# Altium PCB agm_evb.PcbDoc
Units mm, origin at the board's own origin, x right, y up, seen from the top; angles counter-clockwise.
Board outline 29 x 45.6 mm, 2 copper layers (Top Layer, Bottom Layer); 59 components, 56 nets, 240 pads, 237 vias.
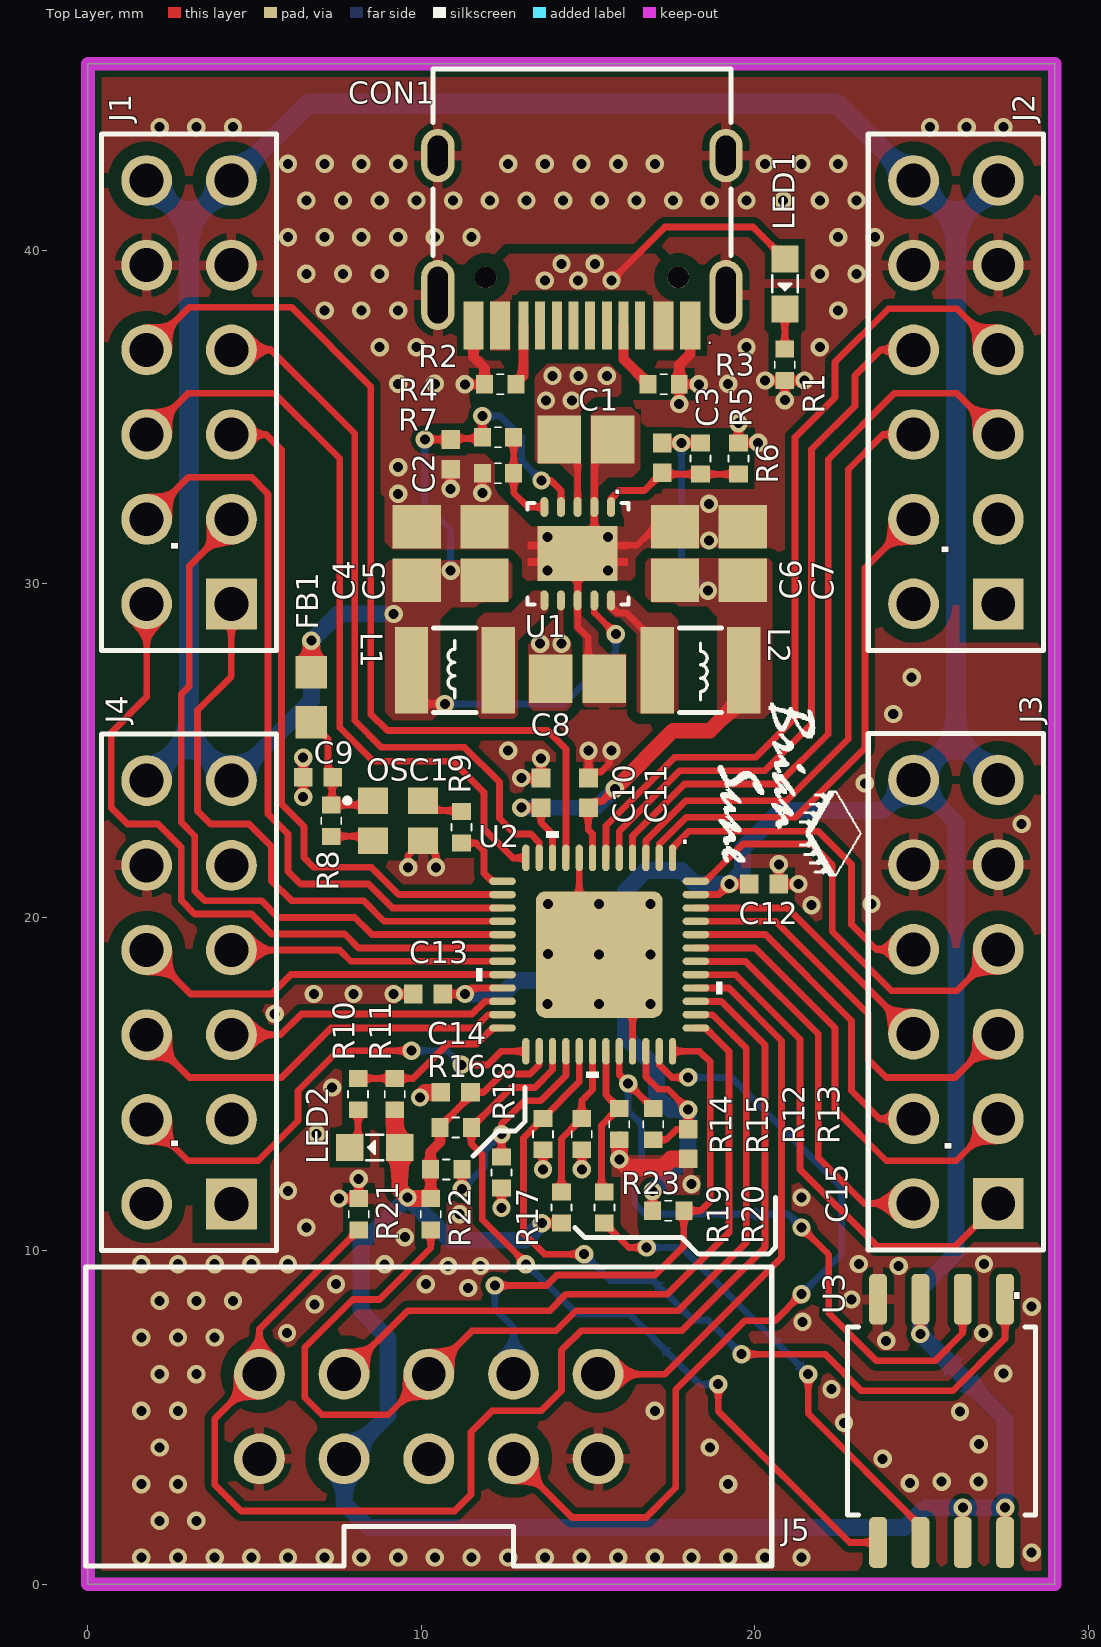
[diagram p0: Top Layer view]
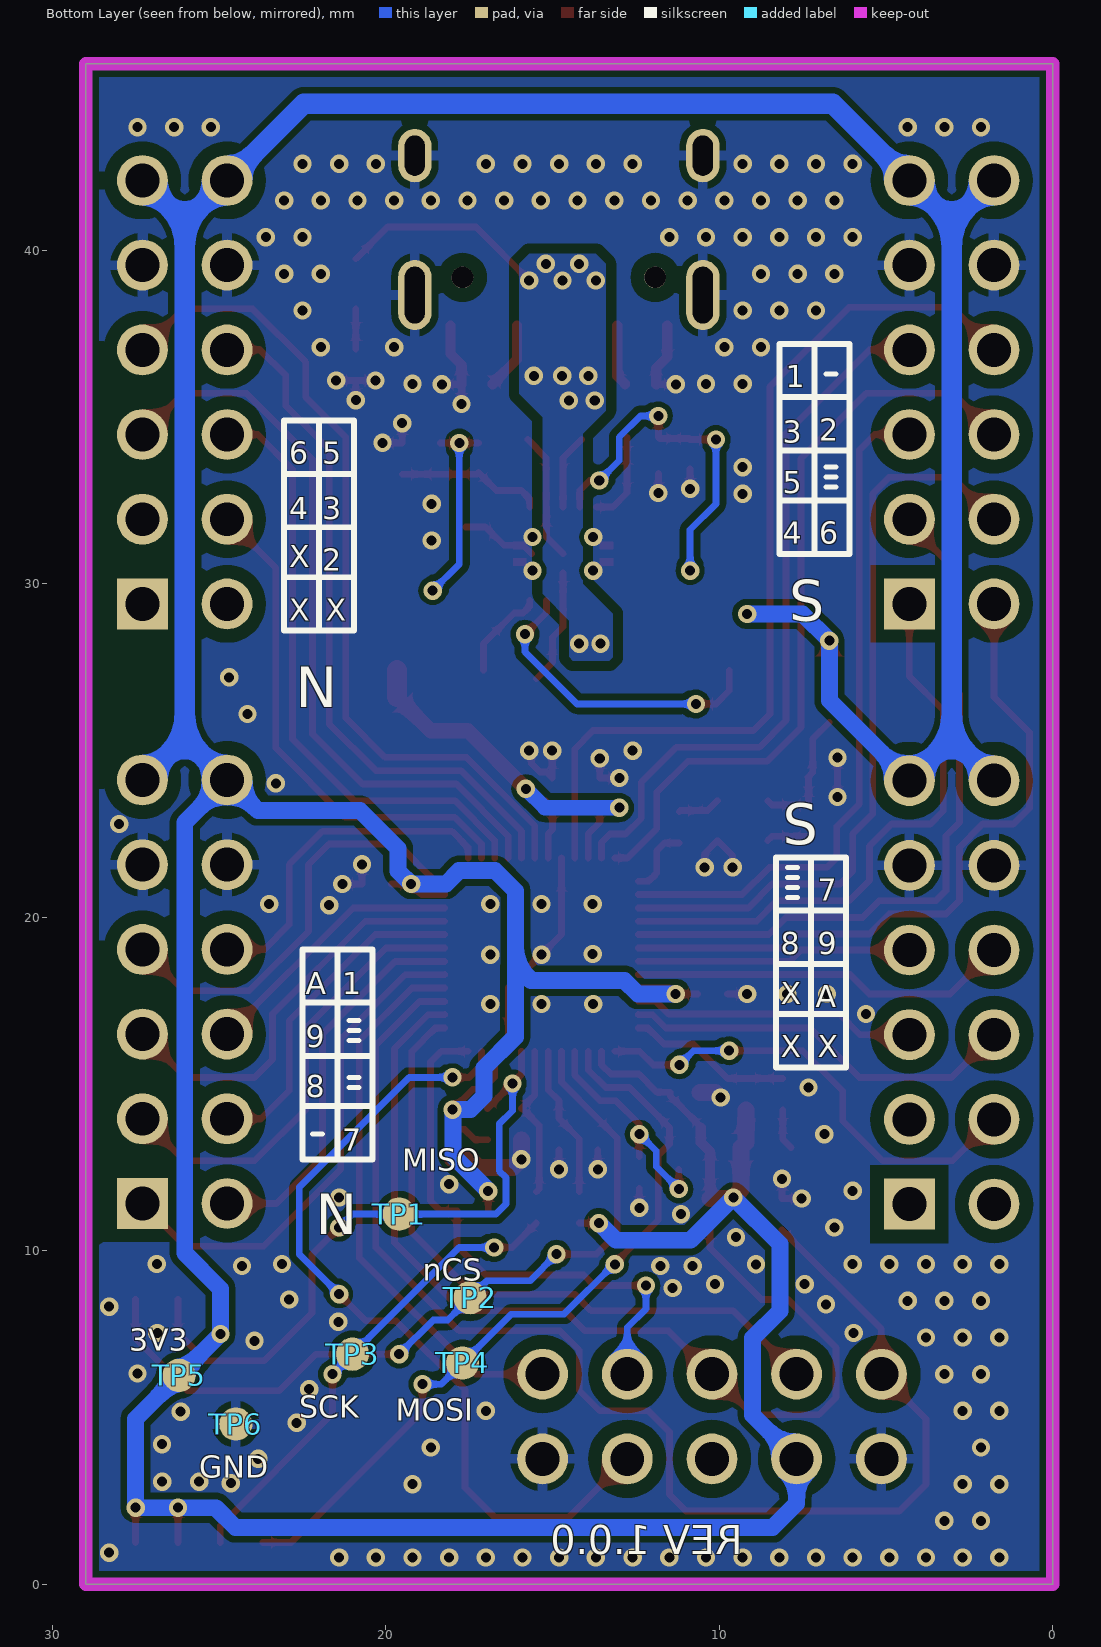
[diagram p1: Bottom Layer view, seen from below]
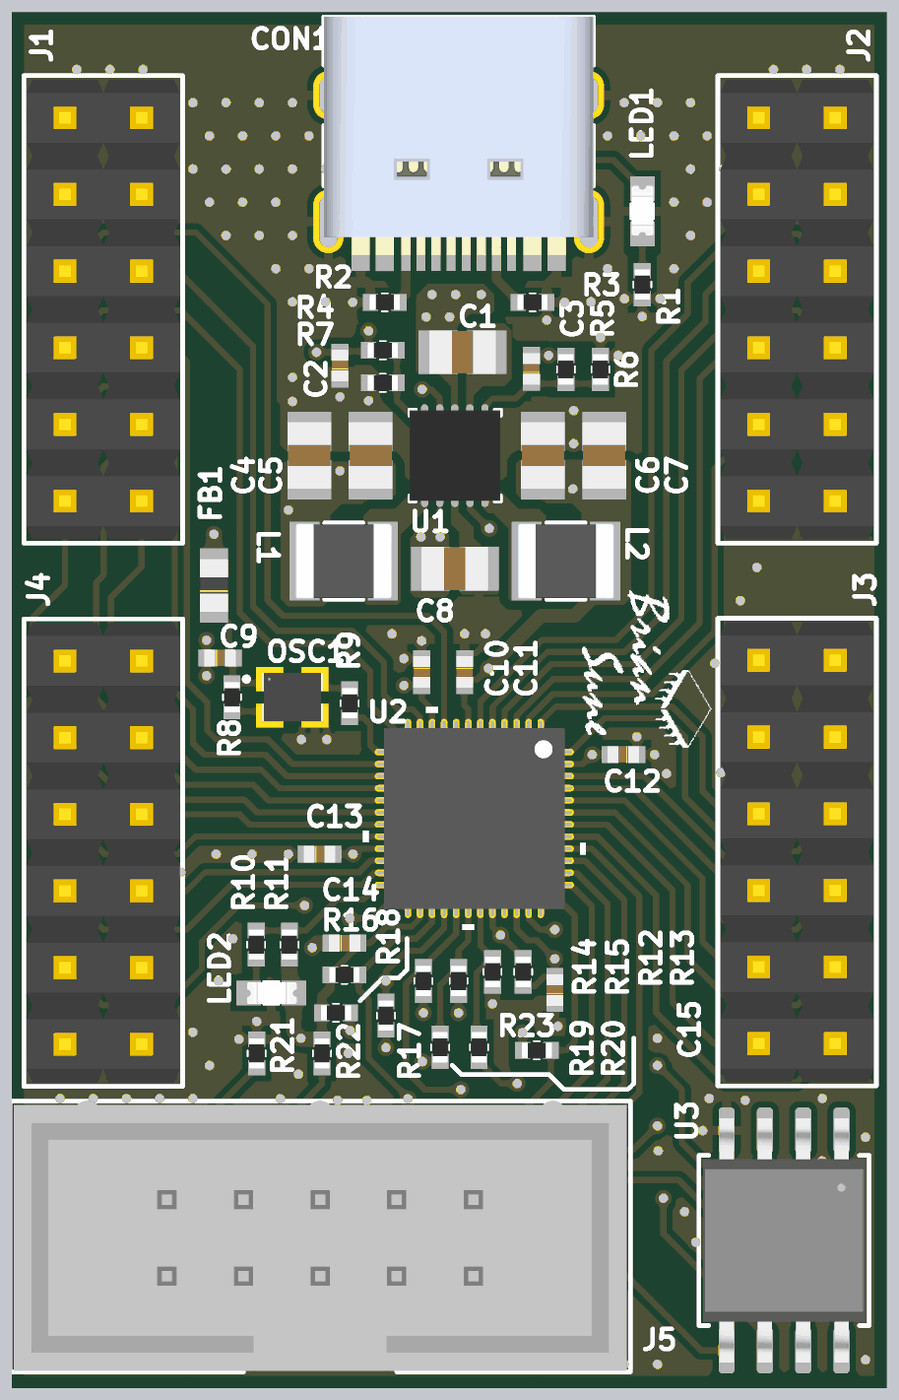
[diagram p2: 3D render of the assembled board from above, using the file's embedded part models]

## Layer stack, top to bottom
Top Solder: solder mask 0.0102, Solder Resist, Dk 3.5
Top Layer: signal copper 0.0356
Dielectric 1: dielectric 0.32, FR-4, Dk 4.8
Bottom Layer: signal copper 0.0356
Bottom Solder: solder mask 0.0102, Solder Resist, Dk 3.5

## Board outline
0,0 29,0 29,45.6 0,45.6

## Design rules (kind name [scope] priority, off if disabled: settings)
Clearance [All] p1: gap=0.152 ignorepadtopadclearanceinfootprint=FALSE except(0: Arc-Hole Track-Hole SMDPad-Hole THPad-Hole Via-Hole Fill-Hole Poly-Hole Region-Hole Text-Hole; 0.203: Arc-Poly Track-Poly SMDPad-Poly SMDPad-Region THPad-Region Fill-Poly Poly-Region; 0.305: Poly-Poly; 0.406: THPad-Poly)
ComponentClearance [All] p1: gap=0.508 collisioncheckmode=3 verticalgap=0.254 showdistances=FALSE
DiffPairsRouting [All] p1: maxlimit=0.254 minlimit=0.152 mostfreqgap=0.203 toplayer_minwidth=0.152 toplayer_maxwidth=0.381 toplayer_prefwidth=0.203 bottomlayer_minwidth=0.152 bottomlayer_maxwidth=0.381 bottomlayer_prefwidth=0.203 maxuncoupledlength=12.7
Height [All] p1: minheight=0 maxheight=40 prefheight=12.7
HoleSize [All] p1: absolutevalues=TRUE maxlimit=6 minlimit=0.025 maxpercent=80.000 minpercent=20.000
HoleToHoleClearance [All] p1: gap=0.076 allowstackedmicrovias=TRUE
MinimumSolderMaskSliver [All] p1: minsoldermaskwidth=0.025
PolygonConnect Pour_Fill [All vs IsNamedPolygon('SW1V2L_L1', 'SW3V3L_L1', '+1V2_PO_L1', '+3V3_PO_L1', 'GND_DCDC_L1', '+5V_L1', '+5V_L1_A', '+5V_L1_B')] p1: connectstyle=Direct reliefconductorwidth=0.254 reliefentries=4 polygonreliefangle="90 Angle" airgapwidth=0.254
PolygonConnect [All] p2: thpad.connectstyle=Relief thpad.reliefconductorwidth=0.305 thpad.reliefentries=4 thpad.polygonreliefangle="90 Angle" thpad.airgapwidth=0.203 smdpad.connectstyle=Relief smdpad.reliefconductorwidth=0.305 smdpad.reliefentries=4 smdpad.polygonreliefangle="90 Angle" smdpad.airgapwidth=0.203 via.connectstyle=Direct via.reliefconductorwidth=0.305 via.reliefentries=4 via.polygonreliefangle="45 Angle" via.airgapwidth=0.203
RoutingVias [All] p1: holewidth=0.4 width=0.6 viastyle="Through Hole" minholewidth=0.3 minwidth=0.5 maxholewidth=2.8 maxwidth=3
SilkToSilkClearance [All] p1: silktosilkclearance=0.076
SilkToSolderMaskClearance [IsPad] p1: minsilkscreentomaskgap=0.025 clearancetoexposedcopper=TRUE
SolderMaskExpansion [All] p1: expansion=0.003
Width [All] p1: maxlimit=1.016 minlimit=0.152 preferedwidth=0.254
22 further rules are at their usual default settings.

## Components (designator, comment, footprint, x,y, rotation, side; value= is the part's Value field where it differs from the comment)
C1 "22uF" CAPC220145_145N_KEM 14.939,34.332 r180 top (schematic designator C13)
C2 "100nF" CAP_CC0402_YAG 10.875,33.887 r90 top (schematic designator C8)
C3 "33pF" CAP_CC0402_YAG 17.225,33.782 r90 top (schematic designator C1)
C4 "22uF" CAPC220145_145N_KEM 9.859,30.906 r270 top (schematic designator C3)
C5 "22uF" CAPC220145_145N_KEM 11.891,30.906 r270 top (schematic designator C2)
C6 "22uF" CAPC220145_145N_KEM 17.606,30.906 r270 top (schematic designator C5)
C7 "22uF" CAPC220145_145N_KEM 19.638,30.906 r270 top (schematic designator C6)
C8 "22uF" CAPC220145_145N_KEM 14.685,27.156 r180 top (schematic designator C12)
C9 "100nF" CAP_CC0402_YAG 6.9,24.2 r0 top (schematic designator C7)
C10 "470nF" CAP_CC0402_YAG 13.585,23.734 r270 top
C11 "470nF" CAP_CC0402_YAG 15.01,23.734 r270 top
C12 "2.2uF" CAP_CC0402_YAG 20.273,21 r180 top (schematic designator C14)
C13 "470nF" CAP_CC0402_YAG 10.2,17.7 r0 top (schematic designator C4)
C14 "470nF" CAP_CC0402_YAG 11.027,14.752 r0 top (schematic designator C9)
C15 "470nF" CAP_CC0402_YAG 18,13.2 r90 top
CON1 "DX07S016JA1R1500" CONN12_016JA1R1500_JAE 14.812,42.844 r180 top
FB1 "BLM18AG121SN1D" IND_BLM18_0603_MUR 6.7,26.6 r90 top
J1 "PMOD_S1" CON12_2X6_P100UM_HDR_TYC 4.3,29.4 r90 top locked (schematic designator J2)
J2 "PMOD_N2" CON12_2X6_P100UM_HDR_TYC 27.3,29.4 r90 top (schematic designator J5)
J3 "PMOD_N1" CON12_2X6_P100UM_HDR_TYC 27.3,11.42 r90 top (schematic designator J4)
J4 "PMOD_S2" CON12_2X6_P100UM_HDR_TYC 4.3,11.4 r90 top locked (schematic designator J3)
J5 "JTAG" CONN10_G821_20P32X8P7_AMP 15.3,3.76 r180 top (schematic designator J1)
L1 "2.2uH" 1277AS-H-1R0M=P2 11.002,27.41 r0 top
L2 "2.2uH" 1277AS-H-1R0M=P2 18.368,27.41 r180 top
LED1 "SML-LX0603GW-TR" LED_SML-LX0603GW-TR_LUM 20.9,39 r90 top (schematic designator LED2)
LED2 "SML-LX0603GW-TR" LED_SML-LX0603GW-TR_LUM 8.6,13.1 r0 top (schematic designator LED1)
OSC1 "SIT1602AI-73-33S-30.000000G" SON4_SIT1602-7_SIT 9.3,22.9 r0 top
R1 "10k" 0402_PAN 20.9,36.57 r90 top (schematic designator R13)
R2 "5k1" 0402_PAN 12.362,35.986 r0 top (schematic designator R7)
R3 "5k1" 0402_PAN 17.262,35.986 r180 top (schematic designator R8)
R4 "100k" 0402_PAN 12.296,34.395 r180 top (schematic designator R1)
R5 "100k" 0402_PAN 18.368,33.76 r90 top (schematic designator R3)
R6 "100k" 0402_PAN 19.511,33.76 r270 top (schematic designator R4)
R7 "22k1" 0402_PAN 12.296,33.316 r0 top (schematic designator R2)
R8 "10k" 0402_PAN 7.3,22.9 r270 top (schematic designator R9)
R9 "22R" 0402_PAN 11.2,22.7 r90 top (schematic designator R14)
R10 "10k" 0402_PAN 8.1,14.7 r270 top (schematic designator R5)
R11 "10k" 0402_PAN 9.2,14.7 r270 top (schematic designator R6)
R12 "0R" 0402_PAN 15.935,13.8 r90 top (schematic designator R19)
R13 "0R" 0402_PAN 16.95,13.8 r90 top (schematic designator R16)
R14 "0R" 0402_PAN 13.645,13.5 r90 top (schematic designator R15)
R15 "0R" 0402_PAN 14.809,13.5 r90 top (schematic designator R18)
R16 "0R" 0402_PAN 11.027,13.7 r0 top (schematic designator R17)
R17 "0R" 0402_PAN 12.4,12.349 r90 top (schematic designator R23)
R18 "0R" 0402_PAN 10.744,12.441 r180 top (schematic designator R22)
R19 "10k" 0402_PAN 14.2,11.3 r270 top (schematic designator R20)
R20 "22R" 0402_PAN 15.488,11.3 r270 top (schematic designator R21)
R21 "5k1" 0402_PAN 8.117,11.1 r270 top (schematic designator R12)
R22 "10k" 0402_PAN 10.279,11.1 r90 top (schematic designator R10)
R23 "10k" 0402_PAN 17.4,11.2 r180 top (schematic designator R11)
TP1 "TP" 2mm_tp 19.6,11.1 r0 bottom (schematic designator TP2)
TP2 "TP" 2mm_tp 17.473,8.594 r90 bottom (schematic designator TP1)
TP3 "TP" 2mm_tp 21,6.9 r0 bottom
TP4 "TP" 2mm_tp 17.7,6.636 r0 bottom
TP5 "TP" 2mm_tp 26.2,6.265 r90 bottom
TP6 "TP" 2mm_tp 24.5,4.804 r90 bottom
U1 "TPS62410DRCT" DRC0010J 14.685,30.906 r270 top
U2 "AG1280Q48" QFN48_EP 15.332,18.883 r270 top
U3 "16Mbit" SOIC_16JLSSIG_WIN 25.6,4.9 r270 top

## Footprints (in the part's own frame and the unit in brackets; to place one, negate y for a bottom-side part, rotate by r counter-clockwise, add the part's x,y. Pads: shape width x height; smd on the part's side, far side on the other; paste and mask are expansions set on the pad)
2mm_tp [mm]
  round 1 smd: 1(0,0)
0402_PAN [mil]
  rect 20x22 smd paste+0 mask+0: 1(-18.5,0) 2(18.5,0)
  silkscreen extent -4,-12 4,12, body extent -20,-10 20,10, height 14
1277AS-H-1R0M=P2 [mm]
  rect 1x2.6 smd paste+0 mask+0: 1(-1.3,0) 2(1.3,0)
  silkscreen extent -0.64,-1.27 0.64,1.27, body extent -1.6,-1.25 1.6,1.25, height 1.2
CAP_CC0402_YAG [mil]
  rect 22x22 smd: 1(-17.5,0) 2(17.5,0)
  body extent -21,-11 21,11, height 22
CAPC220145_145N_KEM [mm]
  rect 1.306x1.45 smd paste+0 mask+0: 1(-0.803,0) 2(0.803,0)
  body extent -1.1,-0.72 1.1,0.72, height 1.45
CON12_2X6_P100UM_HDR_TYC [mil]
  rect 60x60 hole 40 mask+0: 1(0,0)
  round 60 hole 40 mask+0: 2(0,100) 3(100,0) 4(100,100) 5(200,0) 6(200,100) 7(300,0) 8(300,100) 9(400,0) 10(400,100) 11(500,0) 12(500,100)
  silkscreen extent -55,-54 555,154, body extent -50,-50 550,150, height 374
CONN10_G821_20P32X8P7_AMP [mil]
  round 60 hole 40 mask+0: 1(400,0) 2(400,-100) 3(300,0) 4(300,-100) 5(200,0) 6(200,-100) 7(100,0) 8(100,-100) 9(0,0) 10(0,-100)
  silkscreen extent -205,-227 605,127, body extent -200,-227 600,125, height 357
CONN12_016JA1R1500_JAE [mm]
  rect 0.3x1.45 smd: CC1(-1.25,5.095) CC2(1.75,5.095) D+(-0.25,5.095) D+(0.75,5.095) D-(-0.75,5.095) D-(0.25,5.095) SBUS1(1.25,5.095) SBUS2(-1.75,5.095)
  rect 0.6x1.45 smd: GND(-3.25,5.095) GND(3.25,5.095) VBUS(-2.45,5.095) VBUS(2.45,5.095)
  round 0.65 hole 0.65 unplated: M1(2.89,3.65) M2(-2.89,3.65)
  oval 1x2.1 hole 0.6 slot 1.7 at 90 deg mask+0: S(-4.32,4.18) S(4.32,4.18)
  oval 1x1.6 hole 0.6 slot 1.2 at 90 deg mask+0: S(-4.32,0) S(4.32,0)
  silkscreen extent -4.47,-2.6 4.47,3, body extent -4.47,-2.6 4.47,5.3, height 3.2
DRC0010J [mm]
  oval 0.6x0.24 smd: 1(-1.4,1) 2(-1.4,0.5) 3(-1.4,0) 4(-1.4,-0.5) 5(-1.4,-1) 6(1.4,-1) 7(1.4,-0.5) 8(1.4,0) 9(1.4,0.5) 10(1.4,1)
  rect 1.65x2.4 smd: 11(0,0)
  Top Layer region: 0.135,1.5 0.135,1.1 0.365,1.1 0.365,1.5
  Top Layer region: -0.135,1.1 -0.135,1.5 -0.365,1.5 -0.365,1.1
  Top Layer region: -0.135,-1.5 -0.135,-1.1 -0.365,-1.1 -0.365,-1.5
  Top Layer region: 0.135,-1.1 0.135,-1.5 0.365,-1.5 0.365,-1.1
  silkscreen extent -1.52,-1.5 1.52,1.52, body extent -1.5,-1.5 1.5,1.5, height 1
IND_BLM18_0603_MUR [mil]
  rect 38x37 smd paste+0 mask+0: 1(-29.5,0) 2(29.5,0)
  body extent -34,-19 34,19, height 37
LED_SML-LX0603GW-TR_LUM [mil]
  rect 32x32 smd paste+0 mask+0: 1(-29.5,0) 2(29.5,0)
  silkscreen extent -10,-15 10,15, body extent -32,-14 33,14, height 27
QFN48_EP [mm]
  rrect100% 0.8x0.22 smd paste-0.051 mask+0.001: 1(-2.9,2.2) 2(-2.9,1.8) 3(-2.9,1.4) 4(-2.9,1) 5(-2.9,0.6) 6(-2.9,0.2) 7(-2.9,-0.2) 8(-2.9,-0.6) 9(-2.9,-1) 10(-2.9,-1.4) 11(-2.9,-1.8) 12(-2.9,-2.2) 25(2.9,-2.2) 26(2.9,-1.8) 27(2.9,-1.4) 28(2.9,-1) 29(2.9,-0.6) 30(2.9,-0.2) 31(2.9,0.2) 32(2.9,0.6) 33(2.9,1) 34(2.9,1.4) 35(2.9,1.8) 36(2.9,2.2)
  rrect100% 0.22x0.8 smd paste-0.051 mask+0.001: 13(-2.2,-2.9) 14(-1.8,-2.9) 15(-1.4,-2.9) 16(-1,-2.9) 17(-0.6,-2.9) 18(-0.2,-2.9) 19(0.2,-2.9) 20(0.6,-2.9) 21(1,-2.9) 22(1.4,-2.9) 23(1.8,-2.9) 24(2.2,-2.9) 37(2.2,2.9) 38(1.8,2.9) 39(1.4,2.9) 40(1,2.9) 41(0.6,2.9) 42(0.2,2.9) 43(-0.2,2.9) 44(-0.6,2.9) 45(-1,2.9) 46(-1.4,2.9) 47(-1.8,2.9) 48(-2.2,2.9)
  rrect15% 3.8x3.8 smd paste-6 mask+0.025: 49(0,0)
  silkscreen extent -3.7,-3.7 3.7,3.7, body extent -3,-3 3,3, height 0.9
SOIC_16JLSSIG_WIN [mil]
  rrect50% 60x21 smd: 1(-143.5,75) 2(-143.5,25) 3(-143.5,-25) 4(-143.5,-75) 5(143.5,-75) 6(143.5,-25) 7(143.5,25) 8(143.5,75)
  silkscreen extent -111,-111 111,111, body extent -159,-106 159,106, height 85
SON4_SIT1602-7_SIT [mm]
  rect 0.9x0.8 smd paste-0.4 mask+0: 1(-0.75,-0.6) 2(0.75,-0.6) 3(0.75,0.6) 4(-0.75,0.6)
  silkscreen extent -1.6,0.52 -1.45,0.68, body extent -1,-0.8 1,0.8, height 0.8

## Part data
C1 C4 C5 C6 C7 C8: library part C0805C106M9RACTU, "No Description Available", Mfr_Name=Kemet, Copyright="Copyright (C) 2022 Ultra Librarian. All rights reserved.", Manufacturer_Part_Number=C0805C106M9RACTU, RefDes=RefDes, Type=DEV
C2 C9: library part GCM155R71H104ME02J, "GCM155R71H104ME02J / Multilayer Ceramic Capacitors MLCC - SMD/SMT", Mfr.="Murata Electronics", ComponentLink1Description=mouser, ComponentLink1URL=https://www.mouser.hk/ProductDetail/Murata-Electronics/GCM155R71H104ME02J?qs=QzBtWTOodeX25ZLBhHkqFQ%3D%3D, Mfr. No=GCM155R71H104ME02J
C3: library part GCM1555C1H330JA16J, "GCM1555C1H330JA16J", Mfr.="Murata Electronics", ComponentLink1Description=mouser, ComponentLink1URL=https://www.mouser.hk/ProductDetail/Murata-Electronics/GCM1555C1H330JA16J?qs=hNud%2FORuBR35r9xfgxU5AA%3D%3D, Mfr. No=GCM1555C1H330JA16J
C10 C11 C13 C14 C15: library part GRM155R71A474KE01D, "GRM155R71A474KE01D / Multilayer Ceramic Capacitors MLCC - SMD/SMT PLEASE SEE MURATA'S SUGGESTED ALTERNATE GRM155R61H474ME11D", Mfr.="Murata Electronics", Mfr. No=GRM155R6YA474ME01D, ComponentLink1Description=mouser, ComponentLink1URL=https://www.mouser.hk/ProductDetail/Murata-Electronics/GRM155R6YA474ME01D?qs=sGAEpiMZZMsh%252B1woXyUXj0ipSi1CtQgVFCJAGxNeTMI%3D
C12: library part GRM155R6YA225ME11D, "GRM155R6YA225ME11D / Multilayer Ceramic Capacitors MLCC - SMD/SMT 2.2UF 35V 20% 0402", Mfr.="Murata Electronics", ComponentLink1Description=mouser, ComponentLink1URL=https://www.mouser.hk/ProductDetail/Murata-Electronics/GRM155R6YA225ME11D?qs=84nSAGdh8NX%252BZ1uZ5doDKg%3D%3D, Mfr. No=GRM155R6YA225ME11D
CON1 LED1 LED2 OSC1: "No Description Available", Copyright="Copyright (C) 2018 Accelerated Designs. All rights reserved", RefDes=RefDes, Type=DEV
  CON1: Built_By=EMA_Matt, Datasheet=https://www.digikey.com/product-detail/en/DX07S016JA1R1500/670-DX07S016JA1R1500CT-ND/11586676?utm_campaign=buynow&WT.z_cid=ref_octopart_dkc_buynow&utm_medium=aggregator&curr=usd&site=us&utm_source=octopart, Manufacturer_Part_Number=DX07S016JA1R1500, SourceLibrary=JAE_Electronics_2020-03-30, Vendor="JAE Electronics"
  LED1 LED2: Built_By=EMA_Cory, Datasheet=https://www.lumex.com/spec/SML-LX0603GW-TR.pdf, Manufacturer_Part_Number=SML-LX0603GW-TR, SourceLibrary=Lumex_2020-09-08, Vendor=Lumex
  OSC1: Built_By=EMA_Justin, Manufacturer_Part_Number=SIT1602AI-73-33S-30.000000G, SourceLibrary=SiTime_2019-03-28_19, Vendor=SiTime
FB1: "No Description Available", Mfr_Name=Murata, Copyright="Copyright (C) 2022 Ultra Librarian. All rights reserved.", Manufacturer_Part_Number=BLM18AG121SN1D, RefDes=RefDes, Type=DEV
J1 J2 J3 J4: library part 10129381-912001BLF, "10129381-912001BLF / Headers & Wire Housings ECONOSTIK HEADER DR VT TH 2X6", Mfr. No=826942-6, ComponentLink1Description=mouser, ComponentLink1URL=https://www.mouser.hk/ProductDetail/Amphenol-FCI/10129381-912001BLF?qs=0lQeLiL1qybH5JyuikDxjQ%3D%3D, Mfr.=10129381-912001BLF
J5: library part G821EU210AGM00Y, "G821EU210AGM00Y / Headers & Wire Housings Box Header 2.54mm*2.54mm Pitch STR DIP, 2x5Pin, G/F, NY6T, TAIL=3.0mm, Color-Black, T&R, WO/CAP", Mfr.="Amphenol ICC", ComponentLink1Description=mouser, ComponentLink1URL=https://www.mouser.hk/ProductDetail/Amphenol-Commercial-Products/G821EU210AGL00RS?qs=PzGy0jfpSMsw%252Bc01gC9TMg%3D%3D, Mfr. No=G821EU210AGM00Y
L1 L2: library part 1277AS-H-2R2M=P2, "1277AS-H-2R2M=P2 / SMD 2.2 UH 20%", Manufacturer_Part_Number=1277AS-H-2R2M=P2, Mfr_Name=Murata, ComponentLink1Description=mouser, ComponentLink1URL=https://www.mouser.hk/ProductDetail/Murata-Electronics/1277AS-H-2R2M%3DP2?qs=4tuKoHGzn104DGWhEjLPYA%3D%3D
R1 R8 R10 R11 R19 R22 R23: library part RT0402FRE0710KL, "RT0402FRE0710KL / SMD 1/16W 10K ohm 1% 50ppm", Mfr.=YAGEO, ComponentLink1Description=mouser, ComponentLink1URL=https://www.mouser.hk/ProductDetail/YAGEO/RT0402FRE0710KL?qs=BXCcY9r%252B08Amup7nMFKW1g%3D%3D, Mfr. No=RT0402FRE0710KL
R2 R3 R21: library part RT0402FRE075K1L, "RT0402FRE075K1L / Thin Film Resistors - SMD 5.1K OHM 1% 50PPM 1/16W", Mfr.=YAGEO, ComponentLink1Description=mouser, ComponentLink1URL=https://www.mouser.hk/ProductDetail/YAGEO/RT0402FRE075K1L?qs=gY0y7AQI9SP4FZkrbB0g%252BA%3D%3D, Mfr. No=RT0402FRE075K1L
R4 R5 R6: library part RT0402FRE07100KL, "RT0402FRE07100KL / SMD 1/16W 100K ohm 1% 50ppm", Mfr.=YAGEO, ComponentLink1Description=mouser, ComponentLink1URL=https://www.mouser.hk/ProductDetail/YAGEO/RT0402FRE07100KL?qs=BXCcY9r%252B08CxTvf5JB1kiw%3D%3D, Mfr. No=RT0402FRE07100KL
R7: library part RT0402FRE0722K1L, "RT0402FRE0722K1L / SMD 1/16W 22.1K ohm 1% 50ppm", Mfr.=YAGEO, ComponentLink1Description=mouser, ComponentLink1URL=https://www.mouser.hk/ProductDetail/YAGEO/RT0402FRE0722K1L?qs=gY0y7AQI9SNvNyhDoNY8tg%3D%3D, Mfr. No=RT0402FRE0722K1L
R9 R20: library part RT0402FRE0722RL, "RT0402FRE0722RL / SMD 1/16W 22 ohm 1% 50ppm", Mfr.=YAGEO, ComponentLink1Description=mouser, ComponentLink1URL=https://www.mouser.hk/ProductDetail/YAGEO/RT0402FRE0722RL?qs=BXCcY9r%252B08AR6tDwkCsBaQ%3D%3D, Mfr. No=RT0402FRE0722RL
R12 R13 R14 R15 R16 R17 R18: library part RC0402FR-070RL, "RC0402FR-070RL / Thick Film Resistors - SMD 0 Ohms 62.5mW 0402 1%", Mfr.=YAGEO, ComponentLink1Description=mouser, ComponentLink1URL=https://www.mouser.hk/ProductDetail/YAGEO/RC0402FR-070RL?qs=sxZXDnvRBEhfSy4CZGX2ww%3D%3D, Mfr. No=RC0402FR-070RL
U1: "TPS62410DRCT / 2.25MHZ 2x800mA Dual Step-Down", Mfr_Name="Texas Instruments", ComponentLink1Description=mouser, ComponentLink1URL=https://www.mouser.hk/ProductDetail/Texas-Instruments/TPS62410DRCR?qs=e2UXF4UEWQ0ltUOqd4EYmg%3D%3D, Manufacturer_Part_Number=TPS62410DRCT
U2: "AG1280Q48 / Replacement EPM1270", Mfr.=AGM, ComponentLink1Description=taobao, ComponentLink1URL=https://item.taobao.com/item.htm?spm=a1z10.3-c-s.w4002-24461620540.9.b1725d4eQU1zMx&id=661396416086, Mfr. No=AG1280Q48
U3: library part W25Q16JLSSIG, "W25Q16JLSSIG / NOR Flash spiFlash, 16M-bit, 4Kb Uniform Sector", Mfr.=Winbond, ComponentLink1Description=mouser, ComponentLink1URL=https://www.mouser.hk/ProductDetail/Winbond/W25Q16JLSSIG?qs=qSfuJ%252Bfl%2Fd6Xi57nHYg5gQ%3D%3D, Mfr. No=W25Q16JLSSIG

## Via types
v1: diameter 0.55, hole 0.3, Top Layer to Bottom Layer, tented both sides, 237 vias

## Nets (pads, with @x,y where several pads share a name; then routed paths per layer and width w, separated by ;. In a path a pad name is that pad's centre, name@x,y a point inside that pad or via, vN(x,y) a via of type N, cw(c..) or ccw(c..) an arc to the next point about the centre after c; other vN are vias at no path point)
+1V2: C3.2 C6.2 C7.2 C10.2 C11.2 L2.1 R5.2 U2.7 U2.10 | length 19.6
  Top Layer w0.203: v1(12.996,23.289) C10.2 13.585,22.85 13.932,22.503 U2.10 ; U2.7 15.132,22.5 15,22.632 15,23.279 C11.2 15.207,23.487 15.431,23.487 v1(15.8,23.856) ; C3.2 17.227,34.228 v1(17.796,34.228) 18.366,34.228 R5.2
  Top Layer w0.457: v1(15.8,23.856) 17.544,25.6 18.658,25.6 L2.1@19.668,26.61
  Top Layer w0.61: L2.1@19.668,26.61 L2.1
  Bottom Layer w0.203: v1(17.796,34.228) 17.796,30.597 v1(18.594,29.8)
  Bottom Layer w0.457: v1(12.996,23.289) 15.234,23.289 v1(15.8,23.856)
+3V3: C2.2 C4.2 C5.2 C12.2 C13.2 C14.2 C15.2 FB1.2 J1.11 J1.12 J2.11 J2.12 J3.11 J3.12 J4.11 J4.12 J5.3 L1.1 LED2.2 R4.2 R11.2 R13.1 R16.1 R18.2 R19.2 R22.2 R23.2 TP5.1 U1.4 U1.9 U2.21 U2.26 U2.34 U2.47 U3.3 U3.7 U3.8 | length 204.9
  Top Layer w0.203: L1.1 9.702,26.798 10.1,26.4 v1(10.7,26.4) ; v1(10.1,34.332) C2.2 10.907,34.363 11.794,34.363 R4.2 v1(11.826,35.038) ; R16.1 10.558,13.725 11.472,14.64 C14.2 11.865,14.752 12.413,15.3 13.254,15.3 13.532,15.578 U2.26 ; C13.2 v1(11.307,17.7) 11.49,17.883 U2.21 ; v1(13.6,33.1) 13.884,33.1 14.185,32.799 U1.4 ; v1(13.611,10.83) R19.2 ; U1.9 15.185,29.136 v1(15.828,28.493) ; U2.34 16.735,15.98 16.735,15.215 17.105,14.844 17.389,14.844 v1(18,14.234) C15.2 17.645,13.645 17.33,13.33 R13.1 ; R23.2 v1(16.93,11.789) ; U2.47 18.235,20.686 18.926,20.686 v1(19.239,21) C12.2 ; v1(24.96,7.505) U3.3@24.96,8.545 ; U3.7 v1(26.235,2.295) ; U3.8 v1(27.505,2.295)
  Top Layer w0.305: R22.2 10.277,11.572 10.277,12.439 R18.2 10.274,12.974 10.558,13.258 R16.1
  Top Layer w0.508: FB1.2 v1(6.7,28.3) ; R11.2 9.2,13.249 LED2.2 9.349,11.831 v1(9.58,11.6) 9.61,11.57 R22.2
  Bottom Layer w0.203: v1(10.1,34.332) 10.1,32.4 10.875,31.625 v1(10.875,30.4) ; v1(10.7,26.4) 14.265,26.4 15.828,27.963 v1(15.828,28.493) ; v1(11.826,35.038) 12.362,35.038 13,34.4 13,33.7 v1(13.6,33.1)
  Bottom Layer w0.508: J4.11 6.7,26.5 v1(6.7,28.3) 7.5,29.1 v1(9.166,29.1) ; v1(11.307,17.7) 12.438,17.7 12.838,18.1 15.643,18.1 16.116,18.573 ; v1(13.611,10.83) 13.097,10.317 10.863,10.317 v1(9.58,11.6) 8.183,10.203 8.183,8.196 9,7.379 9,5.08 J5.3 7.68,2.42 8.4,1.7 24.505,1.7 25.1,2.295 v1(26.235,2.295) v1(27.505,2.295) 27.505,4.96 TP5.1 v1(24.96,7.505) 24.96,8.86 26.03,9.93 26.03,22.85 J3.12 23.84,23.2 20.771,23.2 19.631,22.06 19.631,21.391 v1(19.239,21) 18.2,21 17.8,21.4 16.721,21.4 16.116,20.795 16.116,18.573 ; v1(16.93,11.789) 16.93,11.8 17.992,12.862 17.992,14.225 v1(18,14.234) 17.467,14.234 17.054,14.646 17.054,15.482 16.118,16.418 16.118,18.572 16.116,18.573
  Bottom Layer w0.61: J4.12@1.76,24.12 3.03,25.39 ; J1.12 3.03,40.83 ; J4.11@4.3,24.12 3.03,25.39 ; J3.12 26.03,25.39 ; J3.11 26.03,25.39 ; J2.11 26.03,40.83 ; 3.03,25.39 3.03,40.83 ; 3.03,40.83 J1.11 6.6,44.4 22.46,44.4 J2.12 26.03,40.83 ; 26.03,25.39 26.03,40.83
+5V: C1.2 C8.2 CON1.VBUS LED1.2 U1.3 U1.7 | length 8.5
  Top Layer w0.203: C1.2 14.685,33.783 U1.3 ; v1(15.7,39.1) 17.3,40.7 19.949,40.7 LED1.2
  other v1: 13.562,28.21 14.2,28.21 13.735,35.5 14.511,35.5 13.929,36.242 14.711,36.242 15.562,36.242 13.7,39.1 14.7,39.1 14.2,39.6 15.2,39.6
CRESET_B: R15.2 R19.1 U2.30 | length 4.6
  Top Layer w0.203: R19.1 14.2,13.361 R15.2 14.809,14.508 15.132,14.831 U2.30
DATAOUT: J5.8 R23.1 U2.36 | length 16.5
  Top Layer w0.203: v1(12.2,8.958) 13.752,8.958 14.065,9.271 17.003,9.271 17.87,10.138 R23.1 18.364,11.2 18.664,11.5 18.664,15.66 18.341,15.983 U2.36
  Bottom Layer w0.203: v1(12.2,8.958) 12.2,8.26 12.76,7.7 J5.8
GND: C1.1 C2.1 C4.1 C5.1 C6.1 C7.1 C8.1 C9.1 C10.1 C11.1 C12.1 C13.1 C14.1 C15.1 CON1.GND CON1.S J1.9 J1.10 J2.9 J2.10 J3.9 J3.10 J4.9 J4.10 J5.1 J5.9 OSC1.2 R1.1 R2.1 R3.1 R6.1 R7.1 R12.1 R14.1 R15.1 R17.1 R21.1 TP6.1 U1.2 U1.8 U1.11 U2.8 U2.33 U2.49 U3.4 | length 40.4
  Top Layer w0.203: v1(6.455,23.611) C9.1 v1(6.455,24.789) ; v1(7.528,11.57) R21.1 v1(8.117,12.159) ; v1(9.166,17.7) C13.1 ; v1(9.6,21.5) 9.6,21.85 OSC1.2 10.437,21.913 v1(10.437,21.5) ; v1(10.875,32.854) C2.1 ; v1(11.303,35.986) R2.1 ; v1(11.826,32.727) R7.1 ; v1(12.4,11.29) R17.1 ; v1(12.996,24.178) C10.1 v1(13.585,24.767) ; v1(13.645,12.441) R14.1 ; U1.11@14.685,30.331 U1.8 14.685,28.715 15,28.4 15,27.644 C8.1 ; U1.11 15.185,31.406 U1.2 15.191,32.312 15.191,33.78 C1.1 ; U2.8 14.732,19.483 v1(15.332,18.883) 16.332,17.883 U2.33 ; v1(14.809,12.441) R15.1 ; v1(15.01,25) C11.1 15.188,24.356 15.382,24.356 15.634,24.608 15.634,24.934 v1(15.7,25) ; U1.11@15.635,30.906 15.889,31.16 16.463,31.16 17.012,31.709 C6.1 ; v1(17.732,35.397) R3.1 v1(18.321,35.986) ; v1(19.511,34.819) R6.1 v1(20.1,34.23) ; v1(20.311,36.1) R1.1 ; v1(20.717,21.589) C12.1 v1(21.307,21) ; v1(20.9,35.511) R1.1 ; v1(21.489,36.1) R1.1
  Top Layer w0.305: CON1.GND@11.562,37.749 11.562,36.806 11.892,36.476 R2.1 ; R3.1 17.732,36.574 18.062,36.904 CON1.GND@18.062,37.749
  Top Layer w0.508: v1(9.959,14.6) 10.111,14.752 C14.1 ; R12.1 v1(15.935,12.741) 15.947,12.741 16.188,12.5 17.228,12.5 17.483,12.756 C15.1
  other v1: 1.6,0.8 2.7,0.8 3.8,0.8 4.9,0.8 6,0.8 7.1,0.8 8.2,0.8 9.3,0.8 10.4,0.8 11.5,0.8 12.6,0.8 13.7,0.8 14.8,0.8 15.9,0.8 17,0.8 18.1,0.8 19.2,0.8 20.3,0.8 21.4,0.8 28.3,0.949 2.15,1.9 3.25,1.9 1.6,3 2.7,3 19.2,3 24.65,3.03 25.6,3.076 26.707,3.076 23.831,3.76 2.15,4.1 18.65,4.1 26.715,4.2 22.675,4.841 26.151,5.177 1.6,5.2 2.7,5.2 17,5.2 22.3,5.852 2.15,6.3 3.25,6.3 27.45,6.32 23.94,7.3 1.6,7.4 2.7,7.4 3.8,7.4 5.968,7.535 26.852,7.535 21.427,7.87 28.3,8.323 6.799,8.392 2.15,8.5 3.25,8.5 4.35,8.5 22.9,8.54 11.4,8.883 7.44,9 10.131,9 10.8,9.543 11.771,9.543 24.312,9.543 1.6,9.6 2.7,9.6 3.8,9.6 4.9,9.6 6,9.6 8.9,9.596 23.117,9.605 26.87,9.605 9.5,10.408 6.55,10.7 11.149,11.1 21.4,11.6 6,11.8 18.1,12 6.852,13.5 7.324,14.9 5.6,17.1 13.785,17.4 15.332,17.4 16.869,17.4 6.771,17.7 7.965,17.7 13.796,18.9 16.869,18.883 21.7,20.367 13.8,20.4 15.332,20.4 16.869,20.4 23.5,20.4 28,22.8 23.3,24.022 12.6,25 24.15,26.1 24.7,27.2 13.78,30.4 15.6,30.4 18.624,31.3 13.78,31.406 15.6,31.406 18.624,32.4 9.3,32.7 9.3,33.5 9.3,36 10.4,36 19.2,36 8.75,37.1 9.85,37.1 19.75,37.1 21.95,37.1 7.1,38.2 8.2,38.2 9.3,38.2 22.5,38.2 6.55,39.3 7.65,39.3 8.75,39.3 21.95,39.3 23.05,39.3 6,40.4 7.1,40.4 8.2,40.4 9.3,40.4 10.4,40.4 11.5,40.4 22.5,40.4 23.6,40.4 6.55,41.5 7.65,41.5 8.75,41.5 9.85,41.5 10.95,41.5 12.05,41.5 13.15,41.5 14.25,41.5 15.35,41.5 16.45,41.5 17.55,41.5 18.65,41.5 19.75,41.5 20.85,41.5 21.95,41.5 23.05,41.5 6,42.6 7.1,42.6 8.2,42.6 9.3,42.6 12.6,42.6 13.7,42.6 14.8,42.6 15.9,42.6 17,42.6 20.3,42.6 21.4,42.6 22.5,42.6 2.15,43.7 3.25,43.7 4.35,43.7 25.25,43.7 26.35,43.7 27.45,43.7
ION1: J3.8 U2.1 | length 10.3
  Top Layer w0.203: U2.1 17.532,22.097 18.021,22.586 21.894,22.586 22.9,21.58 22.9,19.78 23.64,19.04 J3.8
ION2: J2.4 U2.2 | length 15.2
  Top Layer w0.203: U2.2 17.135,21.786 17.135,22.203 17.932,23 21.22,23 23.3,25.08 23.3,30.48 J2.4
ION3: J2.6 U2.3 | length 18.3
  Top Layer w0.203: U2.3 16.735,21.786 16.735,22.306 17.929,23.5 20.956,23.5 22.8,25.344 22.8,33.437 23.843,34.48 J2.6
ION4: J2.5 U2.4 | length 22.5
  Top Layer w0.203: U2.4 16.332,22.447 17.885,24 20.7,24 22.2,25.5 22.2,33.738 24.177,35.715 26.065,35.715 J2.5
ION5: J2.8 U2.5 | length 21
  Top Layer w0.203: U2.5 15.935,21.786 15.935,22.586 17.75,24.4 20.3,24.4 21.7,25.8 21.7,34.038 23,35.338 23,36.251 23.769,37.02 J2.8
ION6: J2.7 U2.6 | length 25.2
  Top Layer w0.203: U2.6 15.532,22.747 17.585,24.8 20.02,24.8 21.2,25.98 21.2,34.397 22.4,35.597 22.4,36.651 24,38.251 26.069,38.251 J2.7
ION7: J3.2 U2.42 | length 11.7
  Top Layer w0.203: U2.42 18.235,18.68 19.72,18.68 21.9,16.5 21.9,12.8 23.28,11.42 J3.2
ION8: J3.3 U2.43 | length 13.7
  Top Layer w0.203: U2.43 18.235,19.08 20,19.08 22.4,16.68 22.4,14.24 23.94,12.7 26.04,12.7 J3.3
ION9: J3.5 U2.45 | length 12.3
  Top Layer w0.203: U2.45 20.617,19.883 23.4,17.1 23.4,15.74 23.94,15.2 26,15.2 J3.5
ION10: J3.7 U2.48 | length 13
  Top Layer w0.203: U2.48 18.522,21.083 19.639,22.2 21.7,22.2 22.32,21.58 22.32,19.58 24.1,17.8 26.06,17.8 J3.7
IONGB1: J3.1 U2.41 | length 15.3
  Top Layer w0.203: U2.41 18.235,18.28 19.42,18.28 21.356,16.344 21.356,12.444 23.662,10.138 26.018,10.138 J3.1
IONGB2: J3.4 U2.44 | length 10
  Top Layer w0.203: U2.44 20.317,19.483 22.9,16.9 22.9,14.8 23.74,13.96 J3.4
IONGB3: J3.6 U2.46 | length 8.1
  Top Layer w0.203: U2.46 20.977,20.283 J3.6
IOS1: J1.7 U2.11 | length 21.5
  Top Layer w0.203: J1.7 5.495,37.02 8,34.515 8,25.9 8.8,25.1 11.292,25.1 12.339,24.053 12.339,22.972 12.811,22.5 13.281,22.5 13.532,22.249 U2.11
IOS2: J1.6 U2.12 | length 23
  Top Layer w0.203: J1.6 2.995,35.715 5.596,35.715 7.551,33.76 7.551,25.694 8.564,24.68 10.946,24.68 11.877,23.749 11.877,22.655 12.749,21.783 U2.12
IOS3: J1.5 U2.14 | length 20.6
  Top Layer w0.203: J1.5 5.338,34.48 5.8,34.018 5.8,23.4 6.476,22.724 6.476,21.795 6.771,21.5 8.5,21.5 9.317,20.683 U2.14
IOS4: J1.1 U2.16 | length 17.8
  Top Layer w0.203: J1.1 4.3,27.228 3.284,26.212 3.284,23.188 3.672,22.8 4.83,22.8 5.495,22.135 5.495,21.105 6.1,20.5 8.264,20.5 8.881,19.883 U2.16
IOS5: J1.3 U2.17 | length 21.8
  Top Layer w0.203: J1.3@4.5,32 3.04,30.54 3.04,26.94 2.8,26.7 2.8,22.847 3.2,22.447 3.2,20.8 3.5,20.5 5.2,20.5 5.7,20 8,20 8.517,19.483 U2.17
IOS6: J1.2 U2.18 | length 21
  Top Layer w0.203: J1.2 1.76,26.61 0.7,25.55 0.7,23.279 1.179,22.8 2.1,22.8 2.8,22.1 2.8,20.5 3.2,20.1 4.9,20.1 5.5,19.5 7.7,19.5 8.117,19.083 U2.18
IOS7: J4.8 U2.20 | length 11.5
  Top Layer w0.203: J4.8 3.08,17.7 5.5,17.7 6.083,18.283 U2.20
IOS8: J4.5 U2.22 | length 8.5
  Top Layer w0.203: J4.5 5.78,16.48 6.4,17.1 11.52,17.1 11.903,17.483 U2.22
IOS9: J4.6 U2.23 | length 12
  Top Layer w0.203: J4.6 3.04,15.2 5.8,15.2 7.283,16.683 11.605,16.683 12.002,17.08 12.429,17.08 U2.23
IOS10: J4.4 U2.25 | length 14.1
  Top Layer w0.203: J4.4 3,12.7 5.1,12.7 6.3,13.9 6.3,14.8 7.5,16 v1(9.702,16) ; v1(11.2,15.575) 11.977,15.575 12.385,15.983 U2.25
  Bottom Layer w0.203: v1(9.702,16) 10.775,16 v1(11.2,15.575)
IOSGB1: J1.8 U2.9 | length 27.6
  Top Layer w0.203: J1.8 3.04,38.3 6.1,38.3 8.479,35.921 8.479,26.101 8.98,25.6 13.785,25.6 14.332,25.053 U2.9
IOSGB2: R9.1 U2.13 | length 2.1
  Top Layer w0.203: R9.1 11.638,22.23 11.877,21.99 11.877,21.323 12.117,21.083 U2.13
IOSGB3: J1.4 U2.15 | length 22.8
  Top Layer w0.203: J1.4 3.02,33.2 4.9,33.2 5.4,32.7 5.4,23.1 6,22.5 6,21.38 6.38,21 8.413,21 9.13,20.283 U2.15
IOSGB4: J4.7 U2.19 | length 8.3
  Top Layer w0.203: J4.7 7.543,19.02 7.88,18.683 U2.19
NCS: J5.7 U2.35 | length 25
  Top Layer w0.203: J5.7 14.52,2 16.732,2 17.628,2.896 17.628,5.834 19.693,7.9 20.6,7.9 v1(21.4,8.7) ; U2.35 17.135,15.98 17.135,15.575 17.51,15.2 v1(18,15.2)
  Bottom Layer w0.203: v1(18,15.2) 19.3,15.2 22.6,11.9 22.6,9.9 v1(21.4,8.7)
NetC3_1: C3.1 R5.1 R6.2 U1.1 | length 4.4
  Top Layer w0.203: U1.1 15.685,32.556 15.929,32.8 16.688,32.8 C3.1 17.272,33.29 R5.1 R6.2
NetC9_2: C9.2 FB1.1 OSC1.4 R8.1 | length 4.1
  Top Layer w0.203: FB1.1 7.2,25.351 7.2,24.345 C9.2 7.322,24.178 7.322,23.392 R8.1 8.42,23.37 OSC1.4
NetCON1_CC1: CON1.CC1 R3.2 | length 2.1
  Top Layer w0.305: CON1.CC1 16.065,37.747 16.065,36.739 16.792,36.011 R3.2
NetCON1_CC2: CON1.CC2 R2.2 | length 1.9
  Top Layer w0.305: R2.2 12.832,36.011 13.062,36.242 CON1.CC2
NetLED1_1: LED1.1 R1.2 | length 1.2
  Top Layer w0.203: R1.2 LED1.1
NetLED2_1: LED2.1 R10.2 | length 1.2
  Top Layer w0.203: LED2.1 8.1,13.349 R10.2
NetOSC1_1: OSC1.1 R8.2 | length 1.3
  Top Layer w0.203: R8.2 8.42,22.43 OSC1.1
NetOSC1_3: OSC1.3 R9.2 | length 1.3
  Top Layer w0.203: OSC1.3 10.348,23.202 11.168,23.202 R9.2
NetR4_1: R4.1 R7.2 U1.5 | length 2.8
  Top Layer w0.203: R4.1 R7.2 12.766,32.734 13.194,32.306 U1.5
NetR10_1: R10.1 R11.1 U2.24 | length 5
  Top Layer w0.203: R10.1 R11.1 9.754,15.17 10.784,16.2 11.659,16.2 12.142,16.683 U2.24
NetR17_2: R17.2 R18.1 U2.28 | length 7
  Top Layer w0.203: v1(11.214,11.852) R18.1 ; R17.2 v1(12.4,13.5) 12.4,13.8 13.098,14.498 13.566,14.498 14.332,15.264 U2.28
  Bottom Layer w0.203: v1(11.214,11.852) 11.89,12.528 11.89,12.99 v1(12.4,13.5)
NetR20_2: R20.2 TP3.1 U3.6 | length 14.4
  Top Layer w0.203: R20.2 16.218,10.1 v1(16.754,10.1) ; v1(21.6,6.3) 21.6,5.115 24.965,1.75 U3.6
  Bottom Layer w0.203: v1(16.754,10.1) 17.8,10.1 21.1,6.8 v1(21.6,6.3)
SPI_CLK: R12.2 R20.1 U2.31 | length 4.7
  Top Layer w0.203: R20.1 15.402,11.856 15.402,13.762 15.91,14.27 R12.2 15.532,14.673 U2.31
SPI_MISO: R13.2 TP1.1 U2.32 U3.2 | length 20.2
  Top Layer w0.203: U2.32 15.935,15.98 15.935,15.284 v1(16.2,15.02) R13.2 ; v1(21.4,10.7) 22.215,9.885 22.215,8.136 23.651,6.7 25.4,6.7 26.235,7.535 U3.2
  Bottom Layer w0.203: v1(16.2,15.02) 16.2,14.2 16.6,13.8 16.6,12.4 16.4,12.2 16.4,11.4 16.7,11.1 TP1.1 21,11.1 v1(21.4,10.7)
SPI_MOSI: R16.2 TP4.1 U2.27 U3.5 | length 23
  Top Layer w0.203: v1(13.132,9.594) 13.132,9.627 11.827,10.932 11.827,12.87 11.497,13.2 R16.2 12.697,14.9 13.403,14.9 13.932,15.429 U2.27 ; v1(18.9,6) 18.9,5.2 22.845,1.255 U3.5
  Bottom Layer w0.203: v1(13.132,9.594) 13.165,9.594 14.659,8.1 16.236,8.1 TP4.1 18.336,6 v1(18.9,6)
SPI_nCS: R14.2 TP2.1 U2.29 U3.1 | length 24.4
  Top Layer w0.203: U2.29 14.732,15.057 R14.2 13.062,13.387 13.062,10.523 13.685,9.9 v1(14.881,9.9) ; v1(19.6,6.9) 22.1,6.9 23.2,5.8 25.935,5.8 27.505,7.37 U3.1
  Bottom Layer w0.203: v1(14.881,9.9) 15.681,9.1 16.967,9.1 TP2.1 18.144,7.923 18.577,7.923 v1(19.6,6.9)
SW1V2L: L2.2 U1.10 | length 2.8
  Top Layer w0.203: U1.10 15.685,29.326 15.883,29.128 16.15,29.128 17.068,28.21 L2.2
SW3V3L: L1.2 U1.6
TCK: J5.2 R21.2 U2.39 | length 40
  Top Layer w0.203: R21.2 5.14,7.653 J5.2 3.8,4.96 3.8,2.995 4.595,2.2 10.997,2.2 11.49,2.693 11.49,4.572 12.118,5.2 13.585,5.2 14.2,5.815 14.2,7.019 14.781,7.6 17.8,7.6 20.3,10.1 20.3,16.173 18.993,17.48 18.235,17.48 U2.39
TDI: J5.10 U2.40 | length 16.7
  Top Layer w0.203: J5.10 17.3,6.3 20.8,9.8 20.8,16.3 19.22,17.88 18.235,17.88 U2.40
TDO: J5.4 U2.37 | length 20
  Top Layer w0.203: J5.4 9.58,8.2 13.842,8.2 14.342,8.7 17.376,8.7 19.222,10.546 19.222,15.983 18.522,16.683 U2.37
TMS: J5.6 R22.1 U2.38 | length 30.4
  Top Layer w0.203: R22.1 10.279,10.079 8.74,8.54 7.94,8.54 6.5,7.1 6.5,5.6 7.016,5.084 9.004,5.084 J5.6 11.52,7.6 14.029,7.6 14.629,8.2 17.7,8.2 19.744,10.244 19.744,16.067 18.732,17.08 18.235,17.08 U2.38
pads on no net: CON1.D+ CON1.D- CON1.M1 CON1.M2 CON1.SBUS1 CON1.SBUS2 J2.1 J2.2 J2.3 J4.1 J4.2 J4.3 J5.5

## Polygon pours and split planes (outlines as drawn)
GND on Top Layer "GND_L01_P020" (solid, remove dead copper, pour order 20): 0,0 0,45.6 29,45.6 29,0
+5V on Top Layer "+5V_L1_B" (solid, remove dead copper, pour order 14): 14.8,35.058 15.242,35.5 15.785,35.5 16,35.715 16,36.242 15.642,36.6 13.78,36.6 13.4,36.22 13.4,33.7 13.5,33.6 14.15,33.6 14.562,33.188 14.562,32.306 14.8,32.306
+5V on Top Layer "+5V_L1_A" (solid, remove dead copper, pour order 12): 14.062,29.7 14.062,29.191 13.2,28.329 13.2,26.359 13.359,26.2 14.35,26.2 14.5,26.35 14.5,28.4 14.3,28.6 14.3,29.7
GND on Top Layer "GND_DCDC_L1" (solid, remove dead copper, pour order 8): 16.109,31.709 15.407,31.709 15.3,31.816 15.3,32.9 15.6,33.2 16.32,33.2 16.562,33.443 16.562,35.038 16.3,35.3 15.3,35.3 15.062,35.062 15.062,31.804 14.958,31.709 13.291,31.709 12.2,32.8 12.2,33.6 11.9,33.9 9.1,33.9 8.9,33.7 8.9,31.271 9.13,31.041 12.723,31.041 12.9,30.864 12.9,30.3 13.1,30.1 14.46,30.1 14.562,30 14.562,28.638 14.831,28.369 14.831,26.4 14.931,26.3 16.1,26.3 16.15,26.35 16.15,27.9 15.6,27.9 15.3,28.2 15.3,28.558 14.8,29.058 14.8,30 14.9,30.1 16.363,30.1 16.5,30.237 16.5,30.771 16.729,31 20.6,31 20.7,31.1 20.7,32.4 20.4,32.7 16.562,32.7 16.3,32.438 16.3,31.9
SW3V3L on Top Layer "SW3V3L_L1" (solid, remove dead copper, pour order 4): 13.796,29.8 13.796,29.196 12.895,28.295 12.895,26.08 12.768,25.953 11.783,25.953 11.656,26.08 11.656,28.913 11.879,29.136 12.68,29.136 13.344,29.8
SW1V2L on Top Layer "SW1V2L_L1" (solid, remove dead copper, pour order 0): 15.562,29.8 15.562,29.243 15.804,29.001 15.955,29.001 16.463,28.493 16.463,26.179 16.541,26.101 17.553,26.101 17.702,26.25 17.702,28.913 17.479,29.136 16.795,29.136 16.131,29.8
+5V on Top Layer "+5V_L1" (solid, remove dead copper, pour order 10): 12.05,37 12.05,39.322 12.628,39.9 16.996,39.9 17.575,39.321 17.575,37 16.95,37 16.95,38.55 16.7,38.8 12.962,38.8 12.662,38.5 12.662,37
+3V3 on Top Layer "+3V3_PO_L1" (solid, remove dead copper, pour order 6): 12.6,30.718 9.032,30.709 8.913,30.59 8.913,26.145 9.167,25.891 10.31,25.891 10.564,26.145 10.564,28.939 10.925,29.3 12.576,29.3 12.723,29.447 12.723,30.594
+1V2 on Top Layer "+1V2_PO_L1" (solid, remove dead copper, pour order 2): 16.84,30.779 20.408,30.771 20.527,30.652 20.527,26.207 20.273,25.953 19.13,25.953 18.876,26.207 18.876,29.001 18.551,29.326 16.9,29.326 16.717,29.509 16.717,30.656
GND on Bottom Layer "GND_L02_P018" (solid, remove dead copper, pour order 18): 0,0 0,45.6 29,45.6 29,0
+5V on Bottom Layer "+5V_L02_P016" (solid, remove dead copper, pour order 16): 13.7,39.9 13.4,39.6 13.4,35.2 14.1,34.5 14.1,30.001 13.2,29.101 13.2,27.8 13.3,27.7 14.4,27.7 14.5,27.8 14.5,28.9 15.3,29.7 15.3,35 16,35.7 16,39.6 15.7,39.9

## Keep-outs
Keep-Out Layer:
  the board outline again, w0.406

## Other copper
Top Layer:
  pour cut-out: 12.913,21.373 17.806,21.373 17.806,16.454 12.913,16.479

## Silkscreen, mask and mechanical layers (free items; w line width, h text height)
Top Overlay:
  drawing of 21 lines, arcs and shapes, not listed
Bottom Overlay:
  lines w0.15: 6.5,32.9 6.8,32.9 ; 6.5,33.2 6.8,33.2 ; 6.5,33.5 6.8,33.5 ; 6.5,36.3 6.8,36.3 ; 7.65,20.6 7.95,20.6 ; 7.65,20.9 7.95,20.9 ; 7.65,21.2 7.95,21.2 ; 7.65,21.5 7.95,21.5 ; 20.8,14.9 21.1,14.9 ; 20.8,15.2 21.1,15.2 ; 20.8,16.3 21.1,16.3 ; 20.8,16.6 21.1,16.6 ; 20.8,16.9 21.1,16.9 ; 21.9,13.5 22.2,13.5
  lines w0.178: 6.1,32.5 8.2,32.5 ; 6.1,34 8.2,34 ; 6.1,35.6 8.2,35.6 ; 6.2,17.1 8.3,17.1 ; 6.2,18.6 8.3,18.6 ; 6.2,20.2 8.3,20.2 ; 7.15,30.9 7.15,37.2 ; 7.25,15.5 7.25,21.8 ; 20.4,14.341 22.5,14.341 ; 20.4,15.841 22.5,15.841 ; 20.4,17.441 22.5,17.441 ; 20.95,30.2 23.05,30.2 ; 20.95,31.7 23.05,31.7 ; 20.95,33.3 23.05,33.3 ; 21.45,12.741 21.45,19.041 ; 22,28.6 22,34.9 ; 6.1,30.9 6.1,37.2 8.2,37.2 8.2,30.9 6.1,30.9 ; 6.2,15.5 6.2,21.8 8.3,21.8 8.3,15.5 6.2,15.5 ; 20.4,12.741 22.5,12.741 22.5,19.041 20.4,19.041 20.4,12.741 ; 20.95,28.6 23.05,28.6 23.05,34.9 20.95,34.9 20.95,28.6
  text "1" at 8,35.9 h0.66
  text "2" at 7,34.3 h0.66
  text "3" at 8.1,34.23 h0.66
  text "5" at 21.9,33.6 h0.66
  text "6" at 22.9,33.6 h0.66
  text "5" at 8.1,32.727 h0.66
  text "3" at 21.9,31.94 h0.66
  text "4" at 22.9,31.94 h0.66
  text "6" at 7,31.2 h0.66
  text "4" at 8.1,31.2 h0.66
  text "X" at 22.9,30.5 h0.66
  text "2" at 21.9,30.4 h0.66
  text "S" at 7.9,28.9 h1.22
  text "X" at 21.8,28.9 h0.66
  text "X" at 22.9,28.9 h0.66
  text "N" at 22.7,26.3 h1.22
  text "S" at 8.1,22.2 h1.22
  text "7" at 7.05,20.5 h0.66
  text "9" at 7.05,18.9 h0.66
  text "8" at 8.15,18.9 h0.66
  text "1" at 21.3,17.7 h0.66
  text "A" at 22.4,17.7 h0.66
  text "X" at 8.15,17.4 h0.66
  text "A" at 7.1,17.3 h0.66
  text "9" at 22.4,16.1 h0.66
  text "X" at 7.05,15.8 h0.66
  text "X" at 8.15,15.8 h0.66
  text "8" at 22.4,14.6 h0.66
  text "7" at 21.3,13 h0.66
  text "MISO" at 19.511,12.4 h0.66
  text "N" at 22.1,10.5 h1.22
  text "nCS" at 18.9,9.1 h0.66
  text "3V3" at 27.7,7 h0.66
  text "SCK" at 22.6,5 h0.66
  text "MOSI" at 19.7,4.9 h0.66
  text "GND" at 25.6,3.2 h0.66
  text "REV 1.0.0" at 9.3,0.9 h0.86